# EAGLE board 74 (EAGLE 6.5.0)
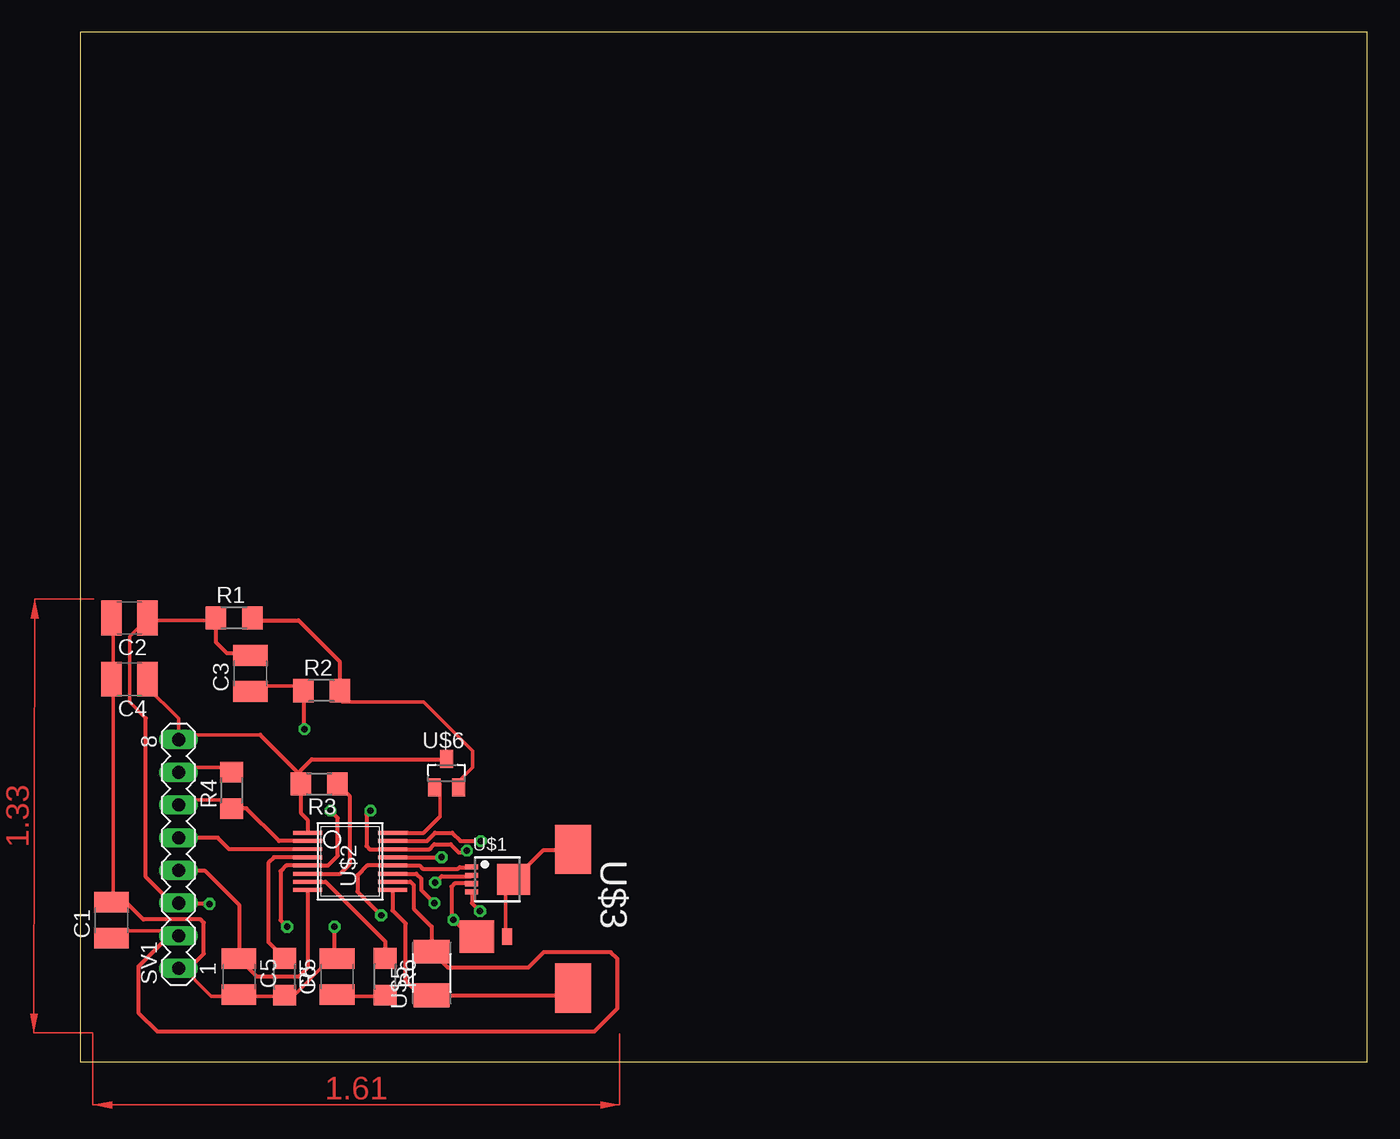
[diagram p0: board, top side]
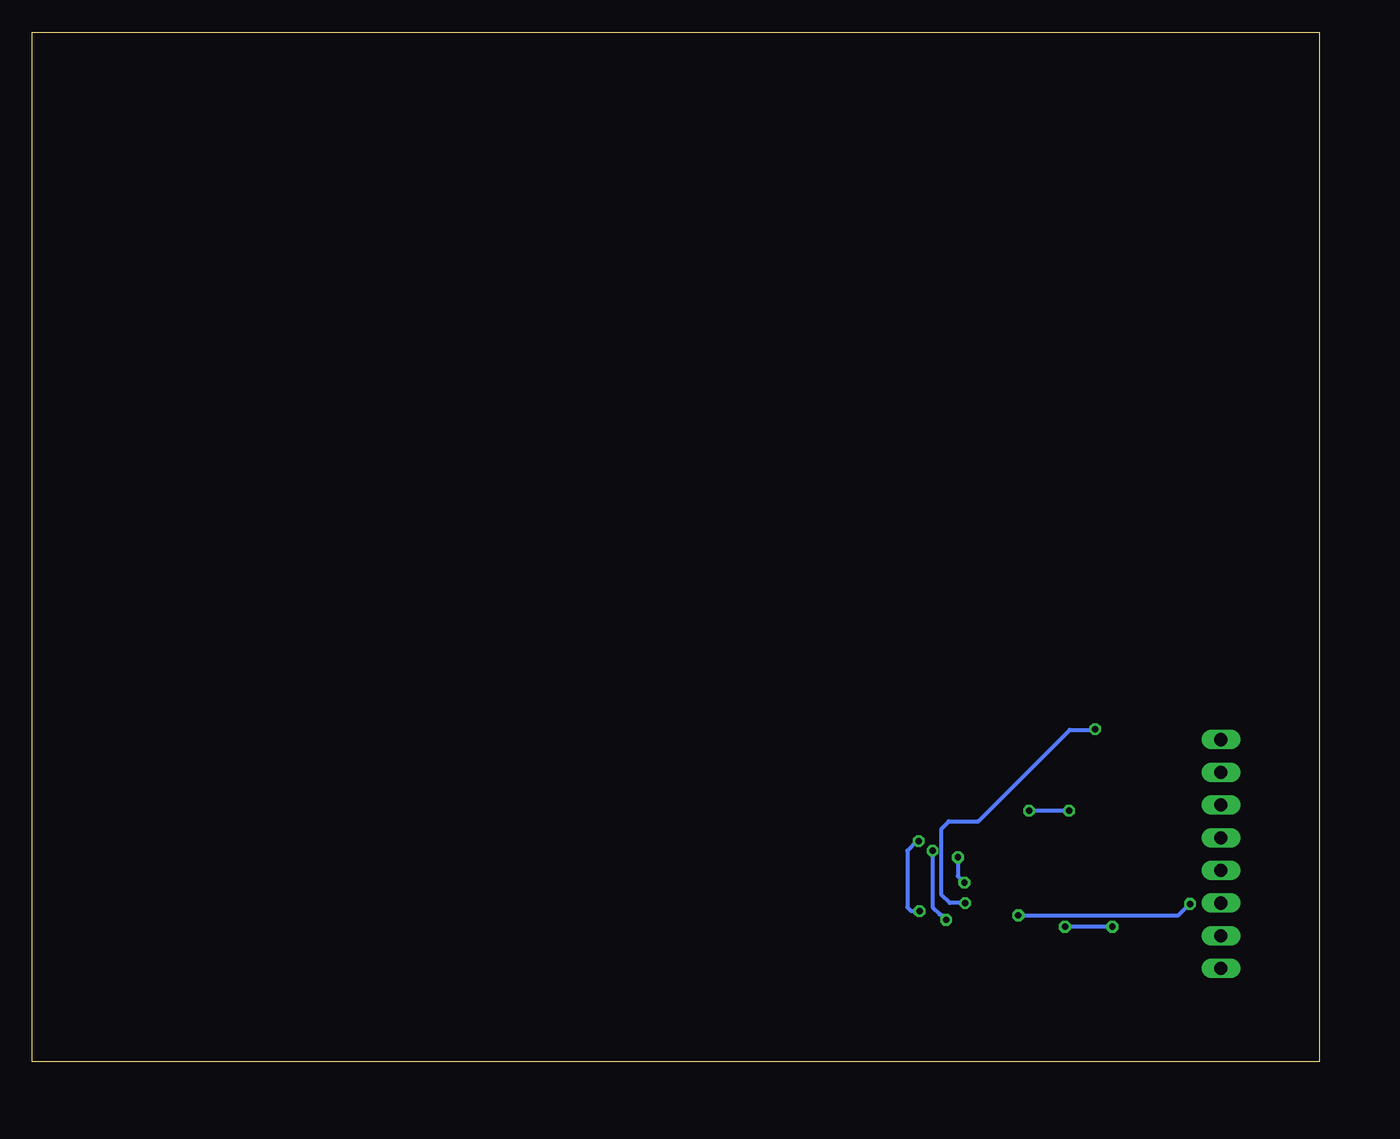
[diagram p1: board, bottom side, seen from below]

Size 100 x 80 mm. Coordinates in mm from the lower left corner, seen from the top.
Outline: 0,0 100,0 100,80 0,80 0,0
Copper layers (1*16): Top 0.035mm / dielectric 1.5mm / Bottom 0.035mm
Design rules "default": minimum track width 10mil, minimum drill 24mil, track to track 8mil, track to pad 8mil, pad to pad 8mil, via to via 8mil, smd to smd 8mil, copper to edge 40mil, drill to drill 8mil, minimum pad ring 10mil, minimum via ring 8mil, stop-mask expansion 4mil, vias tented up to drill 0mil, thermal gap 10mil

## Footprints (pad centres in the part's own frame; a part is rotated, then mirrored left to right if it is on the bottom)
C1210 = smd 1.6 x 2.7: 1 -1.4,0; 2 1.4,0
R1206 = smd 1.6 x 1.803: 1 -1.422,0; 2 1.422,0
MA08-1 = drill 1.016 long: 1 -8.89,0; 2 -6.35,0; 3 -3.81,0; 4 -1.27,0; 5 1.27,0; 6 3.81,0; 7 6.35,0; 8 8.89,0
POWERPAK = smd 2.4 x 2.54: D 0,1.27 | smd 0.4 x 1.016: G1 -0.325,-1.976; G2 0.975,-1.976; S1 -0.975,-1.976; S2 0.325,-1.976
SSOP-16 = smd 2.286 x 0.305: 1 -3.302,2.349; 2 -3.302,1.714; 3 -3.302,1.079; 4 -3.302,0.444; 5 -3.302,-0.191; 6 -3.302,-0.826; 7 -3.302,-1.461; 8 -3.302,-2.096; 9 3.302,-2.096; 10 3.302,-1.461; 11 3.302,-0.826; 12 3.302,-0.191; 13 3.302,0.444; 14 3.302,1.079; 15 3.302,1.714; 16 3.302,2.349
POWERINDUCTOR = smd 3.81 x 2.794: 1 5.397,0; 2 -5.397,0
DIODE = smd 2.667 x 2.54: P$1 -1.638,0 | smd 0.762 x 1.27: P$2 0.699,0
0612/1632 = smd 1.84 x 2.8: 1 -1.7,0; 2 1.7,0
SOT-23 = smd 1 x 1.4: DRAIN 0,1.1; GATE -0.95,-1.1; SOURCE 0.95,-1.1

## Placement (x,y rotation side)
C1  [C1210]  2.41,10.99 90 top
C2  [C1210]  3.81,34.48 180 top
C3  [C1210]  13.21,30.16 90 top
C4  [C1210]  3.81,29.72 180 top
C5  [C1210]  12.32,6.6 270 top
C6  [C1210]  19.94,6.6 90 top
R1  [R1206]  11.94,34.48 0 top
R2  [R1206]  18.73,28.83 0 top
R3  [R1206]  18.54,21.59 180 top
R4  [R1206]  11.75,21.08 90 top
R5  [R1206]  15.88,6.6 270 top
R6  [R1206]  23.69,6.6 270 top
SV1  [MA08-1]  7.62,16.13 90 top
U$1  SI7501DN  [POWERPAK]  32.38,14.16 270 top
U$2  [SSOP-16]  20.95,15.43 0 top
U$3  SDR1005INDUCTOR  [POWERINDUCTOR]  38.29,11.11 270 top
U$4  DIODE  [DIODE]  32.45,9.72 0 top
U$5  0612/1632  [0612/1632]  27.3,6.86 90 top
U$6  MOSFET  [SOT-23]  28.45,22.42 0 top

## Library data of the parts
C1-C6 R1-R6 = resistor
SV1 = con-lstb; OC_FARNELL: unknown; OC_NEWARK: unknown
U$1-U$6 = Custom

## Nets
ACP/SHDN: SV1.5 U$2.3
BATTERY: C1.1 SV1.2 U$2.10 U$5.2
CHG: R4.1 SV1.6 U$2.2
DCIN: C4.1 R3.2 SV1.8 U$2.1 U$6.DRAIN
GND: C1.2 C2.2 C4.2 C5.2 C6.2 R5.2 SV1.1 U$1.S2 U$2.5 U$2.14 U$4.P$1
IMON: C5.1 SV1.4 U$2.8
LOAD: C2.1 C3.2 R1.1 SV1.3 U$1.S1 U$2.12
N$1: U$1.G1 U$2.13
N$2: U$1.G2 U$2.15
N$3: U$1.D U$3.2 U$4.P$2
N$4: U$2.9 U$3.1 U$5.1
N$6: C3.1 R2.1 U$2.11
N$7: R1.2 R2.2 U$6.SOURCE
N$8: U$2.16 U$6.GATE
N$9: R6.1 U$2.7
N$10: R3.1 U$2.6
N$11: C6.1 R6.2
N$12: R5.1 U$2.4
VLOGIC: R4.2 SV1.7

## Tracks (layer width: path | path; a pad name or v marks a point on that pad's centre or on a via)
ACP/SHDN
  Top 0.305: U$2.3 11.56,16.51 10.67,17.4 SV1.5
BATTERY
  Top 0.254: C1.1 2.54,10.16 7.62,10.16 SV1.2
  Top 0.305: U$2.10 25.65,13.97 25.91,13.72 25.91,11.87 27.3,10.48 U$5.2 28.56,7.3 34.8,7.3 36.01,8.51 41.21,8.51 41.72,8 41.72,4.13 39.94,2.35 5.97,2.35 4.51,3.81 4.51,7.37 7.3,10.16 7.62,10.16
CHG
  Top 0.254: R4.1 11.43,20.32 7.62,20.32 SV1.6
  Top 0.305: U$2.2 15.43,17.14 12.89,19.68 11.77,19.68 R4.1
DCIN
  Top 0.254: 17.78,17.78 U$2.1 | 7.62,25.4 7.62,26.67 5.08,29.21 C4.1 | 7.62,25.4 13.97,25.4 | 7.62,25.4 SV1.8
  Top 0.305: R3.2 17.12,22.25 13.97,25.4 | R3.2 17.12,19.33 17.65,18.8 U$2.1 | R3.2 17.12,22.64 17.97,23.5 28.43,23.5 U$6.DRAIN
GND  (via drill 0.5 pad 0.25)
  Top 0.254: C1.2 2.54,12.7 2.54,29.21 C4.2 2.54,30.48 2.54,34.29 C2.2 2.54,35.56 | SV1.1 7.62,7.62 10.16,5.08 11.43,5.08 C5.2 12.7,5.08 15.24,5.08 R5.2 16.51,5.08 19.05,7.62 C6.2 20.32,7.62 | 31.75,8.89 U$4.P$1
  Top 0.305: v16.07,10.48 15.56,10.99 15.56,14.8 16,15.24 U$2.5 19.24,15.24 20,16 20,18.92 v19.43,19.49 | 20.32,7.62 19.75,8.19 v19.75,10.48 | U$1.S2 29.08,13.84 28.83,13.59 28.83,11.18 v28.99,11.02 29.65,10.35 29.72,10.29 30.24,10.29 U$4.P$1 | 7.62,7.62 8.83,7.62 9.59,8.38 9.59,10.79 9.34,11.05 4.89,11.05 3.56,12.38 C1.2 | v22.54,19.49 22.23,19.18 22.23,16.76 22.48,16.51 U$2.14 27.11,16.51 27.5,16.89 28.77,16.89 29.4,16.26 29.91,16.26 v30.04,16.38
  Bottom 0.305: v16.07,10.48 v19.75,10.48 | v19.43,19.49 v22.54,19.49 | v30.04,16.38 30.04,12 29.46,11.43 29.4,11.43 v28.99,11.02
IMON
  Top 0.254: 11.43,7.62 C5.1 | 7.62,15.24 SV1.4
  Top 0.305: U$2.8 17.65,7.3 16.95,6.6 13.72,6.6 C5.1 12.32,12.19 9.65,14.86 SV1.4
LOAD  (via drill 0.5 pad 0.25)
  Top 0.254: 12.7,31.75 C3.2 | 5.08,34.29 10.16,34.29 R1.1 | 5.08,26.67 3.81,27.94 3.81,33.02 5.08,34.29 | 7.62,12.7 SV1.3 | 5.08,34.29 C2.1
  Top 0.305: R1.1 10.52,32.6 11.37,31.75 12.7,31.75 | U$1.S1 30.39,15.11 29.46,15.11 29.34,14.99 26.61,14.99 26.35,15.24 U$2.12 22.29,15.24 21.53,14.48 21.53,13.21 v23.37,11.37 | v10.03,12.26 7.68,12.26 SV1.3 | 7.62,12.7 6.73,12.7 5.08,14.35 5.08,26.67
  Bottom 0.305: v23.37,11.37 10.92,11.37 v10.03,12.26
N$1  (via drill 0.5 pad 0.25)
  Top 0.305: U$2.13 v28.07,15.87 v28.07,15.88 | v27.56,13.91 28.07,14.41 30.34,14.41 U$1.G1
  Bottom 0.305: v28.07,15.88 28.07,14.41 v27.56,13.91
N$2  (via drill 0.5 pad 0.25)
  Top 0.305: U$1.G2 30.43,13.21 30.43,12.3 v31.05,11.68 | v31.12,17.14 | U$2.15 26.92,17.14 27.56,17.78 28.89,17.78 29.53,17.14 v31.11,17.14 v31.12,17.14
  Bottom 0.305: v31.05,11.68 31.69,11.68 32,12 32,16.38 31.24,17.14 v31.11,17.14
N$3
  Top 0.254: U$4.P$2 33.02,10.16 33.02,13.97 U$1.D 34.29,13.97
  Top 0.305: 34.29,13.97 34.29,14.73 36.01,16.45 38.23,16.45 U$3.2
N$4
  Top 0.305: U$3.1 37.73,5.16 U$5.1 26.4,5.16 25.27,6.29 25.27,10.73 24.26,11.75 U$2.9
N$6  (via drill 0.5 pad 0.25)
  Top 0.254: R2.1 17.78,29.21 13.97,29.21 C3.1
  Top 0.305: U$2.11 26.1,14.6 26.48,14.22 26.48,13.34 v27.5,12.32 | v17.4,25.84 17.4,28.74 R2.1
  Bottom 0.305: v27.5,12.32 28.7,12.32 29.34,12.95 29.34,18.1 28.77,18.67 26.48,18.67 19.37,25.78 17.46,25.78 v17.4,25.84
N$7
  Top 0.254: U$6.SOURCE 29.21,21.59 30.48,22.86 30.48,24.13 26.67,27.94 20.32,27.94 R2.2 20.32,29.21 | 13.97,34.29 R1.2
  Top 0.305: 13.97,34.29 16.95,34.29 20.13,31.11 20.13,28.85 R2.2
N$8
  Top 0.254: 27.94,19.05 27.94,21.59 U$6.GATE | 25.4,17.78 24.13,17.78 U$2.16
  Top 0.305: 25.4,17.78 26.67,17.78 27.94,19.05
N$9
  Top 0.305: U$2.7 19.05,13.97 23.69,9.34 R6.1
N$10
  Top 0.305: U$2.6 20.19,14.6 20.95,15.37 20.95,20.6 R3.1
N$11
  Top 0.254: R6.2 22.86,5.08 20.32,5.08 C6.1
N$12
  Top 0.305: U$2.4 15.05,15.87 14.61,15.43 14.61,9.3 R5.1
VLOGIC
  Top 0.254: R4.2 11.43,22.86 7.62,22.86 SV1.7
(copper drawn outside any net)
  shapes: Top area x2